# Altium PCB ReproAmp_V87_Stage_v0.1.PcbDoc
Units mil, origin at the board's own origin, x right, y up, seen from the top; angles counter-clockwise.
Board outline 10000 x 6200 mil, 2 copper layers (Top Layer, Bottom Layer); 66 components, 40 nets, 157 pads, 0 vias.
Unrouted connection lines stored in the file: 56.
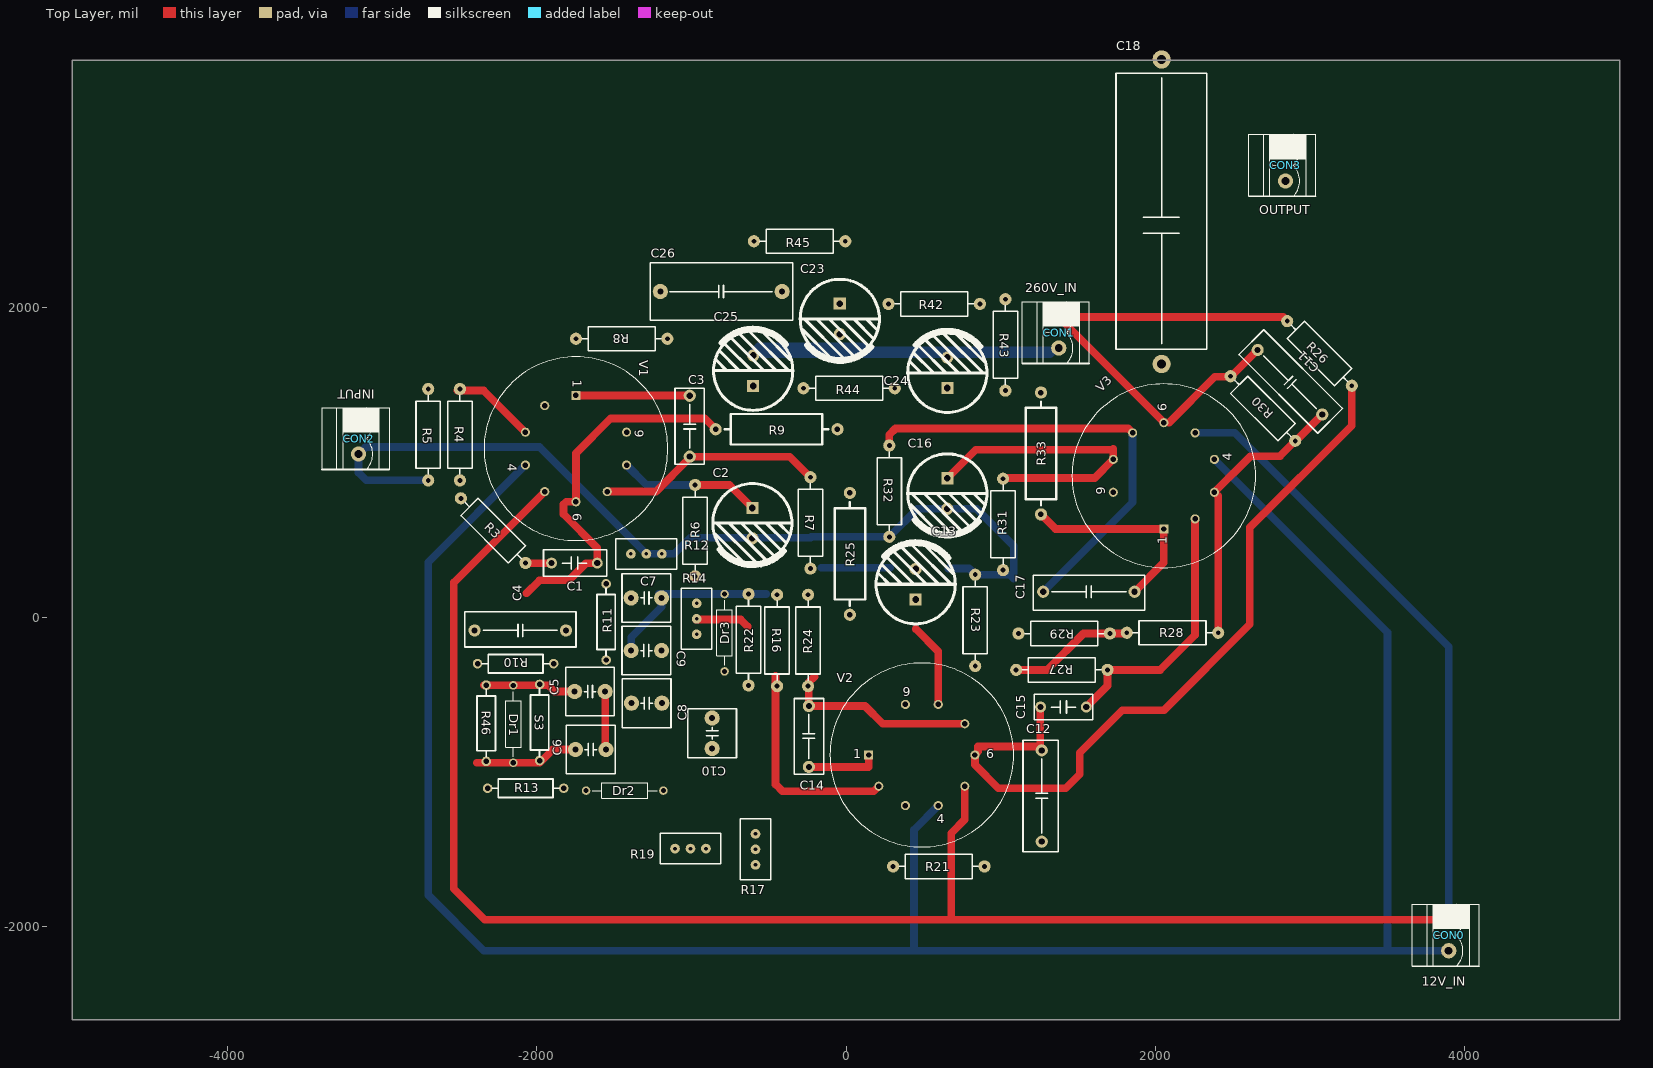
[diagram p0: Top Layer view]
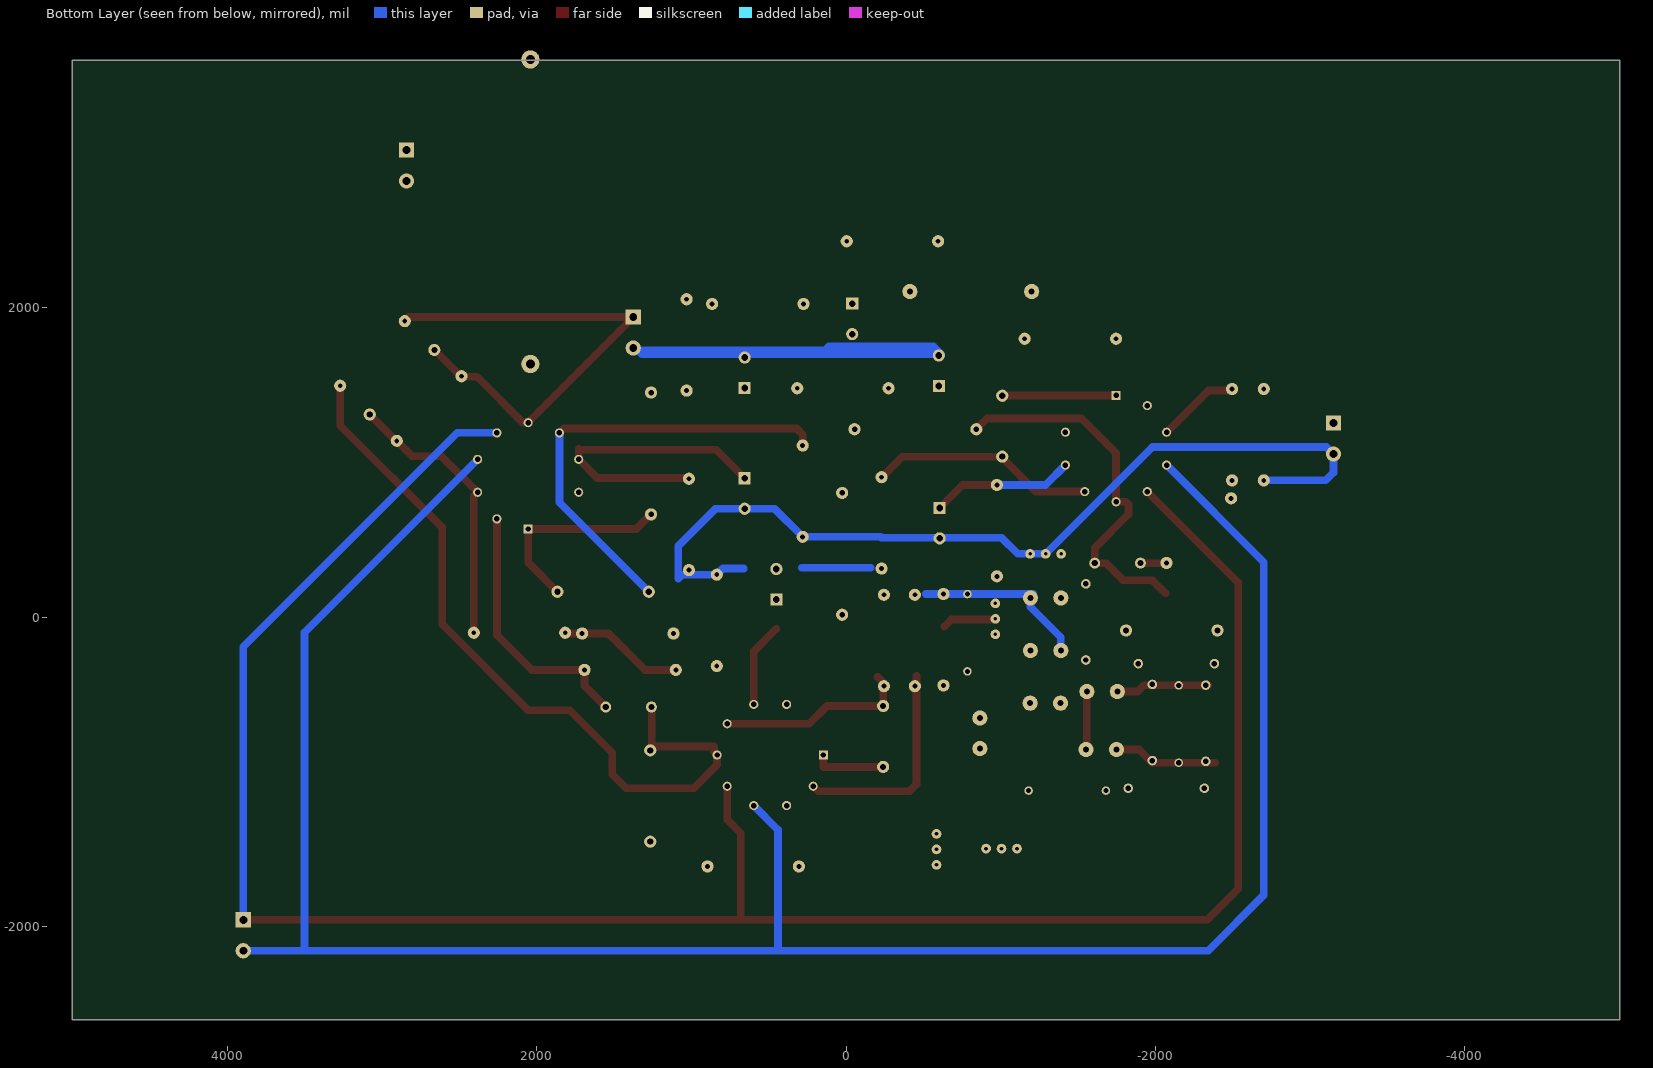
[diagram p1: Bottom Layer view, seen from below]

## Layer stack, top to bottom
Top Solder: solder mask 0.4, Solder Resist, Dk 3.5
Top Layer: signal copper 1.4
Dielectric 1: dielectric 12.6, FR-4, Dk 4.8
Bottom Layer: signal copper 1.4
Bottom Solder: solder mask 0.4, Solder Resist, Dk 3.5

## Board outline
-5000,-2600 -5000,3600 5000,3600 5000,-2600

## Design rules (kind name [scope] priority, off if disabled: settings)
Clearance [All] p1: gap=10 ignorepadtopadclearanceinfootprint=FALSE except(0: Arc-Hole Track-Hole SMDPad-Hole THPad-Hole Via-Hole Fill-Hole Poly-Hole Region-Hole Text-Hole)
PolygonConnect [All] p1: connectstyle=Relief reliefconductorwidth=10 reliefentries=4 polygonreliefangle="90 Angle" airgapwidth=10
RoomDefinition ReproAmp_V87_Stage_v0.1 [InComponentClass('ReproAmp_V87_Stage_v0.1')] p1: confinementstyle=ConfineIn formatcopy=TRUE lockcomponents=FALSE outline 6735,-2499.72 33575,-2499.72 33575,-289.72 6735,-289.72
RoutingVias [All] p1: holewidth=28 width=50 viastyle="Through Hole" minholewidth=28 minwidth=50 maxholewidth=28 maxwidth=50
SolderMaskExpansion [All] p1: expansion=4
Width [All] p1: maxlimit=500 minlimit=10 preferedwidth=50
30 further rules are at their usual default settings.

## Components (designator, comment, footprint, x,y, rotation, side; value= is the part's Value field where it differs from the comment)
C1 "5nF" "CY 7.5*10*4" -1755,350 r0 top
C2 "50uF" "CAP 5.0*12.5*20" -605,608.42 r270 top
C3 "20nF" "CBB 10*12*8" -1010,1235 r90 top
C4 "0.1uF" "CBB 15*18*11" -2105,-85 r180 top
C5 "5nF" "CBB 7.2*7.2*13" -1655,-480 r180 top
C6 "5nF" "CBB 7.2*7.2*13" -1650,-855 r180 top
C7 "400pF" "CBB 7.2*7.2*13" -1290,125 r180 top
C8 "100pF" "CBB 7.2*7.2*13" -1288.43,-555 r180 top
C9 "800pF" "CBB 7.2*7.2*13" -1290,-215 r0 top
C10 "1.6nF" "CBB 7.2*7.2*13" -865,-750 r270 top
C11 "150pF" "CBB 15*18*11" 2869.1,1518.98 r135 top
C12 "0.1uF" "CBB 15*18*11" 1265,-1155 r270 top
C13 "50UF" "CAP 5.0*12.5*20" 450,213.43 r90 top
C14 "20nF" "CBB 10*12*8" -240,-770 r270 top
C15 "2nF" "CY 7.5*8*4" 1405,-580 r0 top
C16 "50uF" "CAP 5.0*12.5*20" 655,800 r270 top
C17 "50nF" "CBB 15*18*11" 1569.72,165 r0 top
C18 "8uF" "CBB 50*30*30" 2040,1636.5 r90 top
C23 "8uF" "CAP 5.0*12.5*20" -40,1928.42 r270 top
C24 "4uF" "CAP 5.0*12.5*20" 655,1580 r90 top
C25 "1uF" "CAP 5.0*12.5*20" -600,1593.43 r90 top
C26 "4uF" "CBB 20*23*17" -806.3,2105 r0 top
CON0 "12V_IN" HX5.08-2L 3895,-2055 r270 top
CON1 "260V_IN" HX5.08-2L 1375,1840 r270 top
CON2 "INPUT" HX5.08-2L -3150,1155 r270 top
CON3 "OUTPUT" HX5.08-2L 2840,2920 r270 top
Dr1 "39.6mH" AXIAL-0.5 -2150,-690 r270 top
Dr2 "160mH" AXIAL-0.5 -1430,-1120 r0 top value=10mH
Dr3 "61mH" AXIAL-0.5 -785,-100 r270 top value=10mH
R3 "5K" "RS 1W" -2280,560 r315 top
R4 "12.5K" "RS 1W" -2495,1180 r270 top
R5 "2K" "RS 1W" -2700,1180 r90 top
R6 "1.25K" "RS 1W" -975,560 r90 top
R7 "1M" "RS 1W" -230,610 r90 top
R8 "200K" "RS 1W" -1450,1800 r180 top
R9 "50K" "RS 2W" -448.7,1215 r0 top
R10 "6K" "RS 1/2W" -2135,-300 r180 top
R11 "50K" "RS 1/2W" -1550,-30 r270 top
R12 "25K" "RS 1/2W-VR" -1290,410 r0 top
R13 "8K" "RS 1/2W" -2070,-1105 r0 top
R14 "500K" "RS 1/2W-VR" -965,-10 r90 top
R16 "500K" "RS 1W" -445,-150 r270 top
R17 "50K" "RS 1/2W-VR" -585,-1500 r90 top
R19 "10K" "RS 1/2W-VR" -1005,-1495 r180 top
R21 "50K" "RS 1W" 599.72,-1610 r0 top
R22 "2K" "RS 1W" -630,-145 r270 top
R23 "1K" "RS 1W" 835,-20 r270 top
R24 "1M" "RS 1W" -245,-150 r270 top
R25 "100K" "RS 2W" 25,410 r90 top
R26 "50K" "RS 1W" 3060,1705 r315 top
R27 "800K" "RS 1W" 1395,-340 r0 top
R28 "1K" "RS 1W" 2110,-100 r0 top
R29 "20K" "RS 1W" 1410,-105 r0 top
R30 "60K" "RS 1W" 2694.1,1348.98 r315 top
R31 "400K" "RS 1W" 1015,600 r270 top
R32 "1M" "RS 1W" 280,815 r270 top
R33 "80K" "RS 2W" 1260,1058.7 r270 top
R42 "50K" "RS 1W" 570,2025 r0 top
R43 "20K" "RS 1W" 1030,1760 r270 top
R44 "20K" "RS 1W" 20,1480 r0 top
R45 "50K" "RS 1W" -300,2430 r0 top
R46 "200K" "RS 1/2W" -2325,-685 r270 top
S3 "0" "RS 1/2W" -1980,-680 r270 top
V1 "Tube E80CC" VTUBE-9 -1745,1090 r270 top
V2 "Tube E80CC" VTUBE-9 490,-890 r0 top
V3 "Tube E80CC" VTUBE-9 2054.1,913.98 r90 top

## Footprints (in the part's own frame and the unit in brackets; to place one, negate y for a bottom-side part, rotate by r counter-clockwise, add the part's x,y. Pads: shape width x height; smd on the part's side, far side on the other; paste and mask are expansions set on the pad)
AXIAL-0.5 [mm] "Axial Device, Thru-Hole; 2 Leads; 0.5 in Pin Spacing"
  round 1.4 hole 0.85: 1(-6.35,0) 2(6.35,0)
  silkscreen extent -5.33,-1.27 5.33,1.27
"CAP 5.0*12.5*20" [mm] "脚距5mm直径12.5mm高度20mm"
  rect 2x2 hole 1.1: 1(-2.5,0)
  round 2 hole 1.1: 2(2.5,0)
  silkscreen extent -6.5,-6.5 6.99,6.5, body extent -6.25,-6.25 6.26,6.25, height 20.03
"CBB 7.2*7.2*13" [mm] "脚距5mm高13mm厚7.2mm"
  round 2.5 hole 1: 1(-2.5,0) 2(2.5,0)
  silkscreen extent -4,-4 4,4, body extent -4,-4 4,4, height 17.53
"CBB 10*12*8" [mm] "脚距10mm高12mm厚8mm"
  round 2 hole 1: 1(-5,0) 2(5,0)
  silkscreen extent -6.22,-2.41 6.22,2.41, body extent -6,-2.25 6,2.25, height 8.53
"CBB 15*18*11" [mm] "脚距15mm高18mm厚11mm"
  round 2 hole 1: 1(-7.5,0) 2(7.5,0)
  silkscreen extent -9.15,-3.07 9.14,2.72, body extent -9.01,-2.92 8.99,2.58, height 11.53
"CBB 20*23*17" [mm] "脚距20mm高23mm厚17mm"
  round 2.5 hole 1: 1(-10,0) 2(10,0)
  silkscreen extent -11.65,-4.67 11.72,4.7, body extent -11.5,-4.5 11.5,4.5, height 17.53
"CBB 50*30*30" [mm] "大型耦合电容 脚距50mm 宽30mm"
  round 3 hole 1.5: 1(0,0) 2(50,0)
  silkscreen extent 2.41,-7.37 47.75,7.49, body extent 2.41,-7.49 47.75,7.62, height 30.3
"CY 7.5*8*4" [mm] "脚距7.5mm，直径8mm，厚4mm"
  round 1.8 hole 1: 1(-3.75,0) 2(3.75,0)
  silkscreen extent -4.75,-2.1 4.85,2.1, body extent -4.04,-2 4.04,2, height 8.2
"CY 7.5*10*4" [mm] "脚距7.5mm，直径10mm，厚4mm"
  round 1.8 hole 1: 1(-3.75,0) 2(3.75,0)
  silkscreen extent -5.08,-2.16 5.33,2.16, body extent -4.88,-2 5.12,2, height 10.2
HX5.08-2L [mm]
  rect 2.5x2.5 hole 1.3: 1(-2.54,0)
  round 2.5 hole 1.3: 2(2.54,0)
  silkscreen extent -5.08,-6 5.08,5, body extent -5.04,-5.5 4.96,2.5, height 11
"RS 1/2W" [mil] "直插色环电阻，脚距12.5mm，直径3mm"
  round 62 hole 35.43: 1(-246.06,0) 2(246.06,0)
  silkscreen extent -217,-59 217,59, body extent -256,-59 256,59, height 122
"RS 1/2W-VR" [mm] "直插3脚顶调可调电阻，脚距2.54mm，长10mm*宽5mm*高10mm"
  round 1.6 hole 0.6: 1(-2.54,0) 2(2.54,0) 3(0,0)
  silkscreen extent -5,-2.5 5,2.5
"RS 1W" [mm] "直插色环电阻，脚距15mm，直径4mm"
  round 2 hole 0.8: 1(-7.5,0) 2(7.5,0)
  silkscreen extent -6.5,-2 6.5,2, body extent -7.8,-2.01 7.8,2.01, height 4.11
"RS 2W" [mm] "直插色环电阻，脚距20mm，直径5mm"
  round 2 hole 0.9: 1(10,0) 2(-10,0)
  silkscreen extent -8.5,-2.5 8.5,2.5, body extent -10.4,-2.51 10.4,2.51, height 5.11
VTUBE-9 [mm] "Vacuum Tube; 9 Leads"
  rect 1.5x1.5 hole 0.9: 1(-8.725,0)
  round 1.5 hole 0.9: 2(-7.059,-5.128) 3(-2.696,-8.298) 4(2.696,-8.298) 5(7.059,-5.128) 6(8.725,0) 7(7.059,5.128) 8(2.696,8.298) 9(-2.696,8.298)
  silkscreen extent -15.08,-15.08 15.08,15.08

## Part data
C1 C3 C4 C5 C6 C7 C8 C9 C10 C11 C12 C14 C15 C17 C18 C26: library part C-CBB, "CBB电容", BOM名称=CBB电容, 学习资源=www.ooocke.com, 版权归属=源创客
C2 C13 C16 C23 C24 C25: library part C-CAP, "直插电解电容", BOM名称=直插电解电容, 学习资源=www.ooocke.com, 版权归属=源创客
CON0 CON1 CON2 CON3: library part EDG5.08-2P
Dr1 Dr2 Dr3: library part "Inductor Iron", "Magnetic-Core Inductor", LatestRevisionDate=17-Jul-2002, LatestRevisionNote="Re-released for DXP Platform.", PackageDescription="Axial Device, Thru-Hole; 2 Leads; 0.9 in Pin Spacing", PackageReference=AXIAL-0.9, Published=24-Mar-1999, Publisher="Altium Limited"
R3 R4 R5 R6 R7 R8 R9 R10 R11 R13 R16 R21 R22 R23 R24 R25 R26 R27 R28 R29 R30 R31 R32 R33 R42 R43 R44 R45 R46 S3: library part R-CRR, "直插色环电阻", BOM名称=色环电阻, 学习资源=www.ooocke.com, 版权归属=源创客
R12 R14 R17 R19: library part VR-W, "直插可调电阻-顶调"
V1 V2 V3: library part "Tube 12AX7", "High Mu Dual Triode", LatestRevisionDate=17-Jul-2002, LatestRevisionNote="Re-released for DXP Platform.", PackageDescription="Vacuum Tube; 9 Leads", PackageReference=VTUBE-9, Published=8-Jun-2000, Publisher="Altium Limited"

## Nets (pads, with @x,y where several pads share a name; then routed paths per layer and width w, separated by ;. In a path a pad name is that pad's centre, name@x,y a point inside that pad or via, vN(x,y) a via of type N, cw(c..) or ccw(c..) an arc to the next point about the centre after c; other vN are vias at no path point)
G12: C2.2 C7.1 C9.1 C13.2 C16.2 C23.2 C24.2 C25.2 C26.2 CON0.2 CON1.2 CON2.2 CON3.2 Dr3.1 R5.1 R6.1 R7.1 R12.2 R12.3 R14.2 R16.1 R22.1 R23.1 R24.1 R29.1 R31.2 R32.2 V1.4 V2.4 V3.4 | length 26039.6
  Bottom Layer w50: R5.1 -3100.28,884.72 -3150,934.45 CON2.2 -3105,1100 -1980,1100 R12.3 ; V1.4 -2700,355.54 -2700,-1795 -2340,-2155 440,-2155 ; C9.1 -1388.43,-128.43 -1191.57,68.43 C7.1 C7.1@-1191.57,150 ; R12.3@-1285,410 R12.2 -1109.72,410 -1005,514.72 -230,514.72 -225,519.72 R32.2 461.85,701.58 C16.2 843.15,701.58 1084.45,460.28 1084.45,250.55 1059.72,275.28 R23.1 795.28,315 660,315 ; C7.1@-1210,150 C7.1@-1191.57,150 ; -515,150 -585,150 -585.28,150.28 R22.1 -910,150.28 -910.28,150 C7.1@-1191.57,150 ; -159.72,320.28 284.72,320.28 ; V2.4 440,-1372.84 440,-2155 ; V3.4 3500,-99.08 3500,-2155 ; CON0.2 3500,-2155 ; 440,-2155 3500,-2155 ; CON1.2@1345,1725 1370,1725 1357.5,1737.5 CON1.2@1345,1725 ; CON1.2@1345,1725 1320,1700 -615,1700 -565,1750 110,1750 135,1725 CON1.2@1345,1725
NetC1_1: C1.1 R3.2 | length 169.1
  Top Layer w50: R3.2 -2070,350 C1.1
NetC1_2: C1.2 C4.1 R9.2 V1.6 | length 2433.3
  Top Layer w50: -2064.72,155.28 -1980,240 -1790,240 -1680,350 C1.2 -1607.36,447.36 -1825,665 -1825,730 -1808.5,746.5 V1.6 -1745,1060 -1520,1285 -912.4,1285 R9.2
NetC2_1: C2.1 R6.2 V1.8 | length 928
  Top Layer w50: R6.2 -753.43,855.28 C2.1
  Bottom Layer w50: V1.8 -1289.73,855.28 R6.2
NetC3_1: C3.1 R7.2 V1.7 | length 1466.5
  Top Layer w50: V1.7 -1385,812.1 -1227.9,812.1 -1010,1030 C3.1 -362.87,1038.15 R7.2
NetC3_2: C3.2 R8.2 V1.1 | length 735.7
  Top Layer w50: V1.1 -1011.65,1433.5 C3.2
NetC4_2: C4.2 R10.2
NetC5_1: C5.1 C6.1 R11.2 | length 377.1
  Top Layer w50: C5.1 -1556.57,-850 C6.1
NetC5_2: C5.2 Dr1.1 R10.1 R46.1 S3.1 | length 602.9
  Top Layer w50: R46.1@-2339.72,-440 -2325,-440 Dr1.1 -1980,-440 -1924.72,-440 -1884.72,-480 C5.2
NetC6_2: C6.2 Dr1.2 R13.1 R46.2 S3.2 | length 671.8
  Top Layer w50: -2385,-940 Dr1.2 -1980,-940 -1973.03,-933.03 -1895,-855 C6.2
NetC7_2: C7.2 C8.2 Dr2.1 R13.2
NetC8_1: C8.1 C9.2 Dr2.2 R14.1
NetC10_1: C10.1 Dr3.2
NetC10_2: C10.2 R19.2 R19.3
NetC11_1: C11.1 R28.2 R30.2 V3.3 | length 1823.2
  Top Layer w50: R28.2 2405.28,783.34 V3.3 2614.36,1041.39 2804.1,1041.39 R30.2 2907.89,1140.19 C11.1
NetC11_2: C11.2 C18.1 CON1.1 R26.1 R30.1 R42.2 R43.1 V3.6 | length 3218.7
  Top Layer w50: V3.6 2054.1,1260.9 CON1.1 2825,1940 R26.1 ; 2087.6,1257.48 2384.1,1553.98 2481.52,1553.98 R30.1 ; R30.1@2486.52,1553.98 C11.2
NetC12_1: C12.1 C15.1 R26.2 V2.6 | length 4927.9
  Top Layer w50: V2.6 833.5,-953.5 985,-1105 1420,-1105 1510,-1015 1510,-875 1785,-600 2055,-600 2610,-45 2610,580 3268.79,1238.79 R26.2 ; V2.6@852.5,-867.5 852.5,-835 1255,-835 C15.1@1255,-580
NetC12_2: C12.2 R21.2
NetC13_1: C13.1 R23.2 V2.8 | length 548.8
  Top Layer w50: 450,-75 596.15,-221.15 V2.8
NetC14_1: C14.1 R24.2 V2.7 | length 1259.9
  Top Layer w50: -203.79,-383.79 -240,-420 C14.1 123.15,-573.15 238.09,-688.09 V2.7
NetC14_2: C14.2 R25.2 V2.1 | length 463.1
  Top Layer w50: C14.2 146.14,-966.85 146.5,-966.5 V2.1
NetC15_2: C15.2 R27.2 V3.2 | length 1706.4
  Top Layer w50: C15.2 1690.28,-442.36 R27.2 2030,-340 2256.01,-113.99 V3.2
NetC16_1: C16.1 R31.1 V3.8 | length 1982.4
  Top Layer w50: C16.1 839.17,1082.59 1722.41,1082.59 1727.41,1087.59 V3.8 1607.56,900.28 1020,900.28 R31.1
NetC17_1: C17.1 R32.1 V3.7 | length 2936.3
  Top Layer w50: R32.1 280,1180 320,1220 1824.07,1220 V3.7
  Bottom Layer w50: C17.1 1852.19,742.74 V3.7
NetC17_2: C17.2 R33.1 V3.1 | length 1317.1
  Top Layer w50: R33.1 1354.53,570.47 V3.1 2054.1,354.1 C17.2
NetC18_2: C18.2 CON3.1
NetC23_1: C23.1 R42.1 R45.2
NetC24_1: C24.1 R25.1 R33.2 R43.2 R44.2
NetC25_1: C25.1 R9.1 R44.1
NetC26_1: C26.1 R8.1 R45.1
NetCON2_1: CON2.1 V1.2
NetR3_1: R3.1 R4.2
NetR4_1: R4.1 R5.2 V1.3 | length 549.7
  Top Layer w50: R4.1@-2510,1465 -2340.54,1465 V1.3
NetR11_1: R11.1 R12.1
NetR14_3: R14.3 R16.2 V2.2 | length 1753.1
  Top Layer w50: R14.3@-970,-15 -680,-15 -635,-60 ; -455,-380 -455,-1080 -410,-1125 179.01,-1125 V2.2
NetR17_1: R17.1 R21.1
NetR17_2: R17.2 R22.2 V2.3
NetR17_3: R17.3 R19.1
NetR27_1: R27.1 R28.1 R29.2 | length 814.4
  Top Layer w50: R27.1 1300,-340 1535,-105 R29.2 1809.72,-105 R28.1
V12: CON0.1 V1.5 V2.5 V3.5 | length 14199.4
  Top Layer w50: V1.5 -2535,224.01 -2535,-1755 -2335,-1955 680,-1955 ; V2.5 767.9,-1307.1 680,-1395 680,-1955 ; CON0.1 680,-1955
  Bottom Layer w50: V3.5 2513.12,1191.88 3895,-190 CON0.1
pads on no net: V1.9 V2.9 V3.9

## Silkscreen, mask and mechanical layers (free items; w line width, h text height)
Mechanical 1:
  the board outline again, w10

## Text inside footprints (layer, text, board x,y; h text height)
CON0: Top Overlay "1" at 3812,-2038 h40 r270
CON1: Top Overlay "1" at 1292,1857 h40 r270
CON2: Top Overlay "1" at -3233,1172 h40 r270
CON3: Top Overlay "1" at 2757,2937 h40 r270
V1: Top Overlay "4" at -2185,993.5 h59.06 r270; Top Overlay "6" at -1765,673.5 h59.06 r270; Top Overlay "9" at -1365,1213.5 h59.06 r270; Top Overlay "1" at -1765,1533.5 h59.06 r270
V2: Top Overlay "4" at 586.5,-1330 h59.06; Top Overlay "6" at 906.5,-910 h59.06; Top Overlay "9" at 366.5,-510 h59.06; Top Overlay "1" at 46.5,-910 h59.06
V3: Top Overlay "4" at 2494.1,1010.47 h59.06 r90; Top Overlay "6" at 2074.1,1330.47 h59.06 r90; Top Overlay "9" at 1674.1,790.47 h59.06 r90; Top Overlay "1" at 2074.1,470.47 h59.06 r90